# EAGLE board Flanetino Uno Rev 1 (EAGLE 9.6.2)
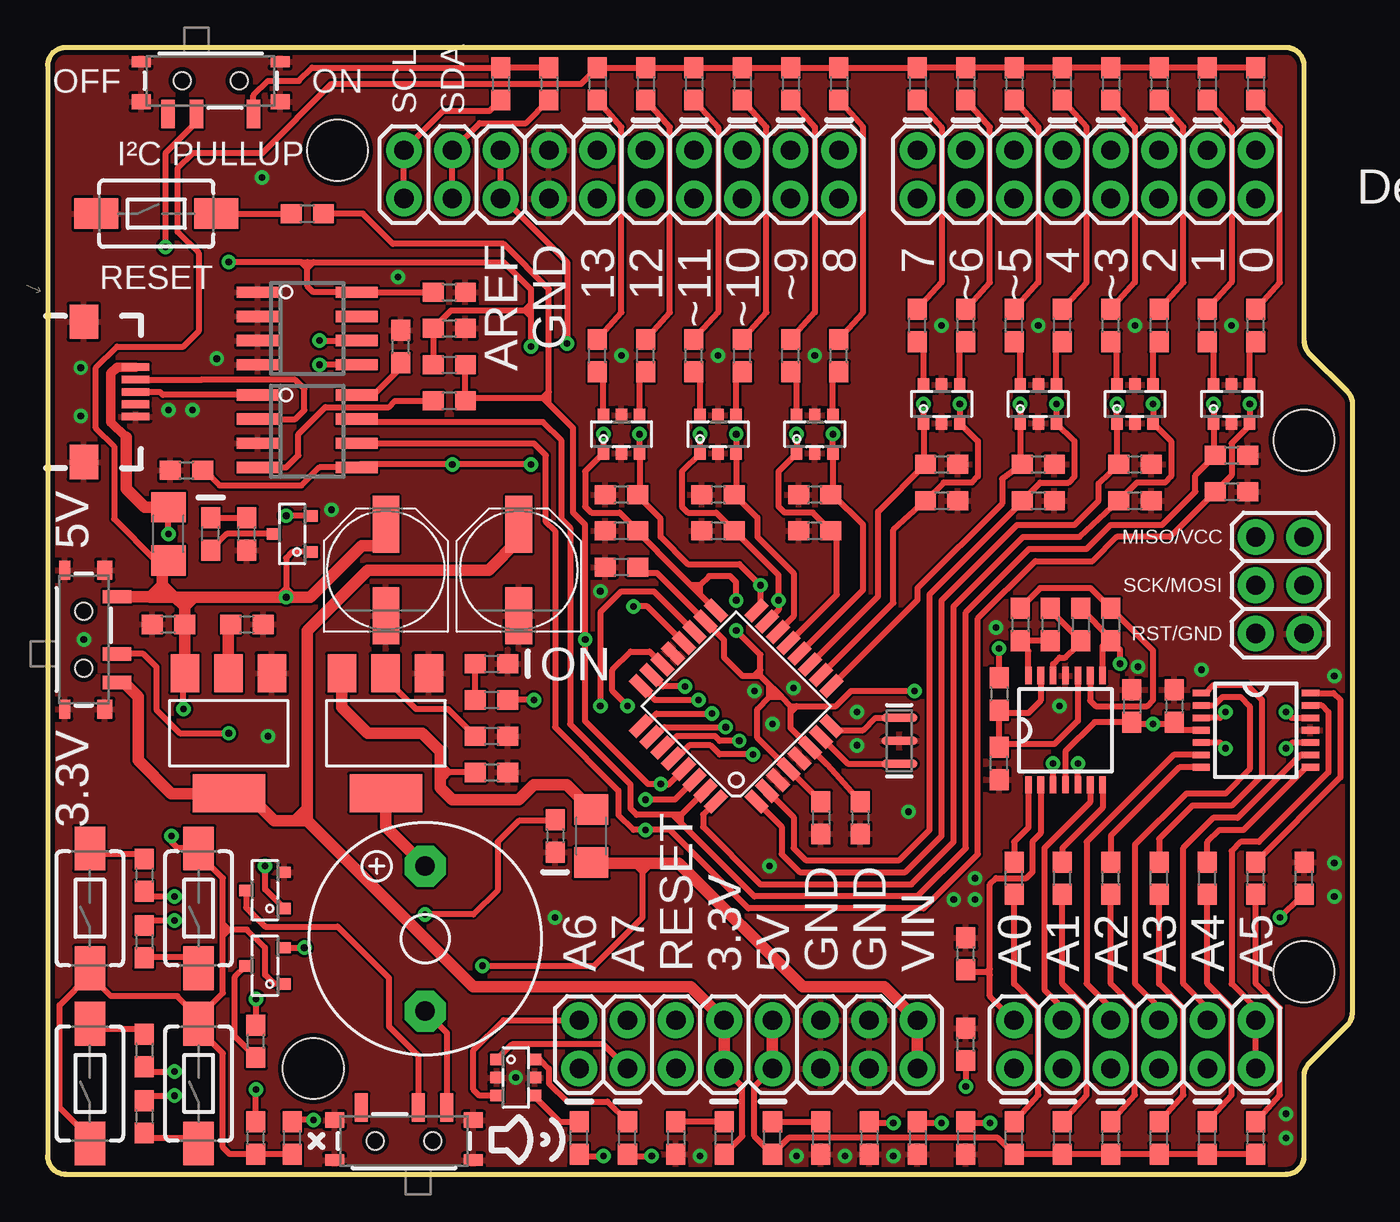
[diagram p0: board, top side]
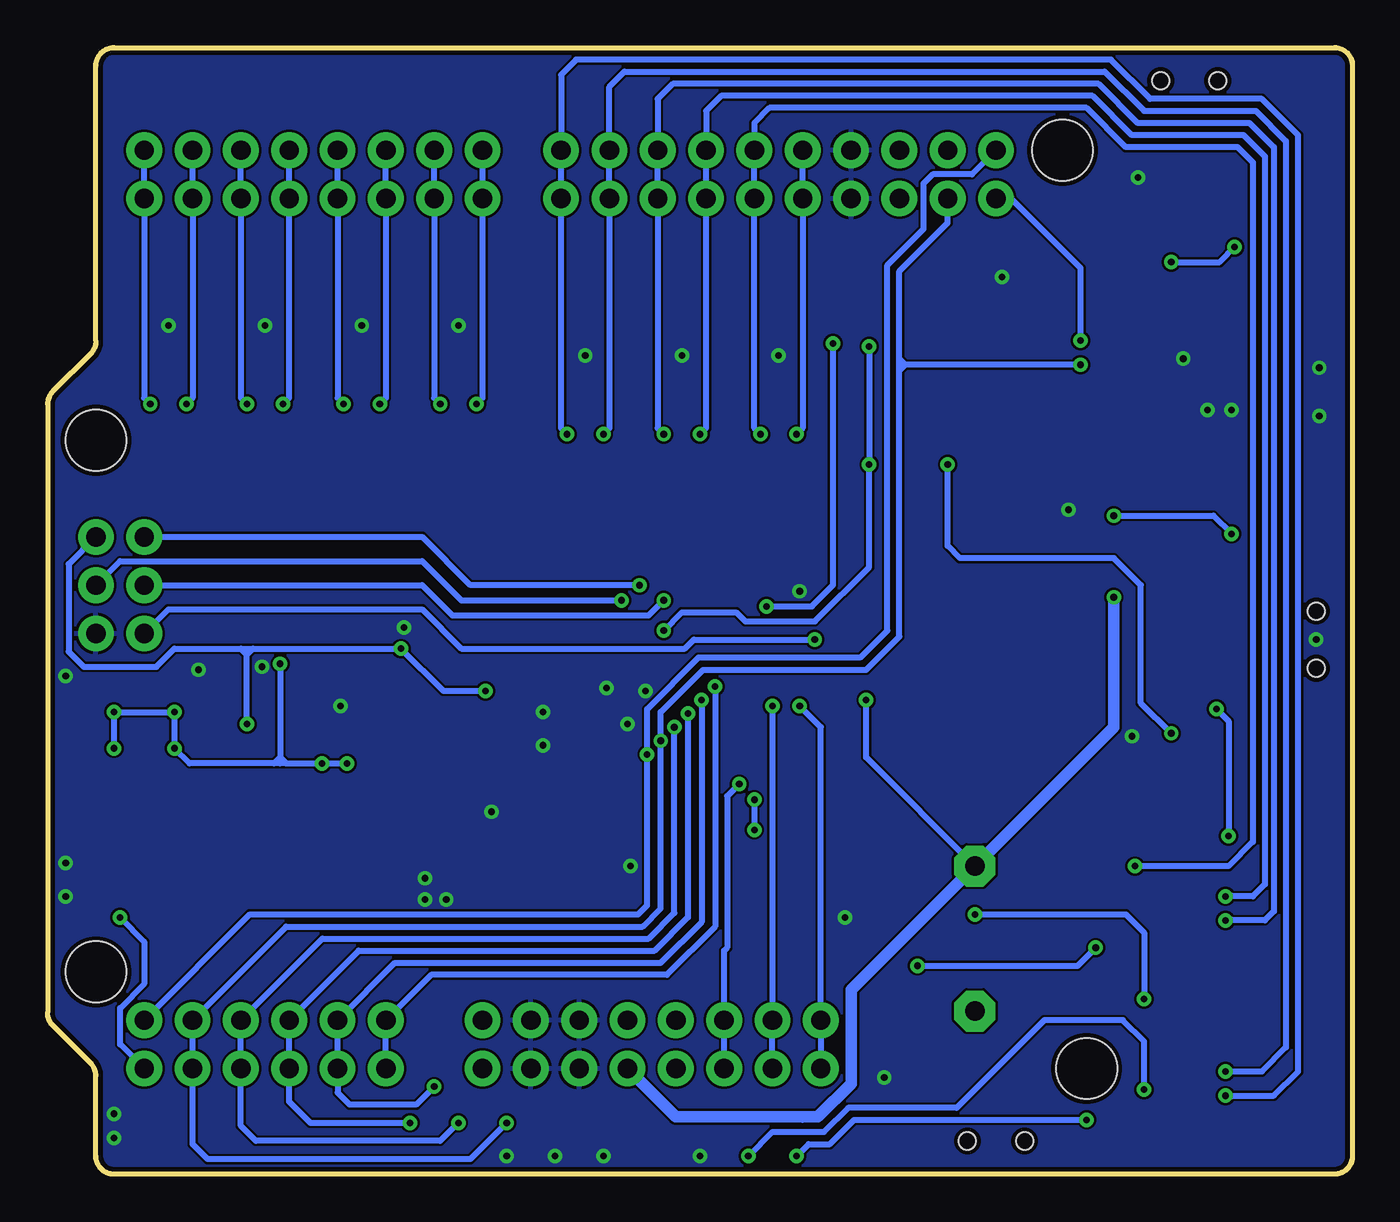
[diagram p1: board, bottom side, seen from below]

Size 68.58 x 59.21 mm. Coordinates in mm from the lower left corner, seen from the top.
Outline: 66.04,43.8 66.04,58.26 arc90 65.09,59.21 0.95,59.21 arc90 0,58.26 0,0.95 arc90 0.95,0 65.09,0 arc90 66.04,0.95 66.04,5.16 arc-45 66.32,5.83 68.3,7.82 arc45 68.58,8.49 68.58,40.47 arc45 68.3,41.14 66.32,43.12 arc-45 66.04,43.8
Copper layers (1*16): Top 0.035mm / dielectric 1.5mm / Bottom 0.035mm
Design rules "default *": minimum track width 6mil, minimum drill 0.2mm, track to track 5mil, track to pad 5mil, pad to pad 5mil, via to via 5mil, smd to smd 5mil, copper to edge 10mil, drill to drill 6mil, minimum pad ring 8mil, minimum via ring 8mil, stop-mask expansion 0mil, vias tented up to drill 24mil, thermal gap 6mil
Net classes: 2 gnd: width 0.305 mm, drill 0.559 mm, clearance 0.254 mm
Holes 3.2 mm at 66.04,38.58 66.04,10.64 15.24,53.82 13.97,5.56

## Footprints (pad centres in the part's own frame; a part is rotated, then mirrored left to right if it is on the bottom)
C0603 = smd 1.1 x 1: 1 -0.85,0; 2 0.85,0
PANASONIC_D = smd 3 x 1.4: + 2.4,0; - -2.4,0
L0603 = smd 1.1 x 1: 1 -0.85,0; 2 0.85,0
1206FUSE = smd 1.6 x 1.8: 1 -1.4,0; 2 1.4,0
2X10 = drill 1.016 pad 1.88: 1 0,0; 2 0,2.54; 3 2.54,0; 4 2.54,2.54; 5 5.08,0; 6 5.08,2.54; 7 7.62,0; 8 7.62,2.54; 9 10.16,0; 10 10.16,2.54; 11 12.7,0; 12 12.7,2.54; 13 15.24,0; 14 15.24,2.54; 15 17.78,0; 16 17.78,2.54; 17 20.32,0; 18 20.32,2.54; 19 22.86,0; 20 22.86,2.54
2X8 = drill 1.016 pad 1.88: 1 0,0; 2 0,2.54; 3 2.54,0; 4 2.54,2.54; 5 5.08,0; 6 5.08,2.54; 7 7.62,0; 8 7.62,2.54; 9 10.16,0; 10 10.16,2.54; 11 12.7,0; 12 12.7,2.54; 13 15.24,0; 14 15.24,2.54; 15 17.78,0; 16 17.78,2.54
USB-B-MICRO-SMD = smd 1.45 x 0.4: D+ 2.725,0; D- 2.725,0.65; GND 2.725,-1.3; ID 2.725,-0.65; VBUS 2.725,1.3 | smd 1.5 x 1.8: SHIELD1 0,3.685; SHIELD2 0,-3.685
2X3 = drill 1.016 pad 1.88: GND 5.08,2.54; MISO 0,0; MOSI 2.54,2.54; RESET 5.08,0; SCK 2.54,0; VCC 0,2.54
2X6 = drill 1.016 pad 1.88: 1 0,0; 2 0,2.54; 3 2.54,0; 4 2.54,2.54; 5 5.08,0; 6 5.08,2.54; 7 7.62,0; 8 7.62,2.54; 9 10.16,0; 10 10.16,2.54; 11 12.7,0; 12 12.7,2.54
F/TMB = drill 1.016 pad 2.159 octagon: + 3.81,0; - -3.81,0
SOT23-6-R = smd 0.6 x 0.7: 1 -0.95,-1; 2 0,-1; 3 0.95,-1; 4 0.95,1; 5 0,1; 6 -0.95,1
SOT23-R = smd 0.6 x 0.7: 1 -0.95,-1; 2 0.95,-1; 3 0,1
R0603 = smd 1.1 x 1: 1 -0.85,0; 2 0.85,0
TACTILE_SWITCH_SMD_6.0X3.5MM = smd 2.3 x 1.6: 1 -3.15,0; 2 3.15,0
SWITCH_SPST_SMD_A = smd 0.7 x 1.5: 1 -2.25,-1.75; 2 -0.75,-1.75; 3 2.25,-1.75 | smd 1 x 0.6: GND1 -3.65,1; GND3 3.65,1 | smd 1 x 0.8: GND2 -3.65,-1.1; GND4 3.65,-1.1 | hole 0.9: -1.5,0; 1.5,0
SO8_RTC = smd 0.6 x 2.2: 1 -1.905,-2.6; 2 -0.635,-2.6; 3 0.635,-2.6; 4 1.905,-2.6; 5 1.905,2.6; 6 0.635,2.6; 7 -0.635,2.6; 8 -1.905,2.6
TQFP32-08 = smd 1.27 x 0.559: 1 -4.293,2.8; 2 -4.293,2; 3 -4.293,1.2; 4 -4.293,0.4; 5 -4.293,-0.4; 6 -4.293,-1.2; 7 -4.293,-2; 8 -4.293,-2.8; 17 4.293,-2.8; 18 4.293,-2; 19 4.293,-1.2; 20 4.293,-0.4; 21 4.293,0.4; 22 4.293,1.2; 23 4.293,2; 24 4.293,2.8 | smd 0.559 x 1.27: 9 -2.8,-4.293; 10 -2,-4.293; 11 -1.2,-4.293; 12 -0.4,-4.293; 13 0.4,-4.293; 14 1.2,-4.293; 15 2,-4.293; 16 2.8,-4.293; 25 2.8,4.293; 26 2,4.293; 27 1.2,4.293; 28 0.4,4.293; 29 -0.4,4.293; 30 -1.2,4.293; 31 -2,4.293; 32 -2.8,4.293
TSSOP14 = smd 0.9 x 0.35: 1 -2.875,1.95; 2 -2.875,1.3; 3 -2.875,0.65; 4 -2.875,0; 5 -2.875,-0.65; 6 -2.875,-1.3; 7 -2.875,-1.95; 8 2.875,-1.95; 9 2.875,-1.3; 10 2.875,-0.65; 11 2.875,0; 12 2.875,0.65; 13 2.875,1.3; 14 2.875,1.95
SOT223 = smd 1.499 x 2.007: 1 -2.261,-3.15; 2 0.025,-3.15; 3 2.311,-3.15 | smd 3.81 x 2.007: 4 0,3.15
RESONATOR-SMD-3.2X1.3 = smd 0.45 x 1.905: 1 -1.2,0; 2 0,0; 3 1.2,0

## Placement (x,y rotation side)
C2  100nF  [C0603]  21.11,46.35 0 top
C3  100nF  [C0603]  21.11,44.45 0 top
C4  100nF  [C0603]  18.57,43.5 90 top
C5  100nF  [C0603]  21.11,40.64 180 top
C6  100nF  [C0603]  7.3,36.99 0 top
C7  100nF  [C0603]  30.16,31.91 180 top
C8  100nF  [C0603]  23.34,23.02 180 top
C9  100nF  [C0603]  6.35,28.89 0 top
C10  100nF  [C0603]  10.48,28.89 180 top
C11  100nF  [C0603]  55.88,28.89 270 top
C12  100nF  [C0603]  56.99,24.61 270 top
C13  100nF  [C0603]  59.21,24.61 270 top
C14  47uF  [PANASONIC_D]  17.78,31.75 90 top
C15  47uF  [PANASONIC_D]  24.77,31.75 90 top
C17  100nF  [C0603]  40.64,18.73 270 top
C18  100nF  [C0603]  42.7,18.73 270 top
C19  100nF  [C0603]  23.34,21.11 180 top
D1  GREEN  [L0603]  28.89,57.31 270 top
D2  GREEN  [L0603]  31.43,57.31 270 top
D3  GREEN  [L0603]  33.97,57.31 270 top
D4  GREEN  [L0603]  36.51,57.31 270 top
D5  GREEN  [L0603]  39.05,57.31 270 top
D6  GREEN  [L0603]  41.59,57.31 270 top
D7  GREEN  [L0603]  45.72,57.31 270 top
D8  GREEN  [L0603]  48.26,57.31 270 top
D9  GREEN  [L0603]  50.8,57.31 270 top
D10  GREEN  [L0603]  53.34,57.31 270 top
D11  GREEN  [L0603]  55.88,57.31 270 top
D12  GREEN  [L0603]  58.42,57.31 270 top
D13  GREEN  [L0603]  60.96,57.31 270 top
D14  GREEN  [L0603]  63.5,57.31 270 top
D15  GREEN  [L0603]  23.34,26.83 0 top
D16  RED  [L0603]  8.57,33.66 90 top
D17  GREEN  [L0603]  35.56,1.91 90 top
D18  GREEN  [L0603]  38.1,1.91 90 top
D19  GREEN  [L0603]  50.8,1.91 90 top
D20  GREEN  [L0603]  53.34,1.91 90 top
D21  GREEN  [L0603]  55.88,1.91 90 top
D22  GREEN  [L0603]  58.42,1.91 90 top
D23  GREEN  [L0603]  60.96,1.91 90 top
D24  GREEN  [L0603]  63.5,1.91 90 top
D25  GREEN  [L0603]  30.48,1.91 90 top
D26  GREEN  [L0603]  27.94,1.91 90 top
D27  RED  [L0603]  26.67,17.78 270 top
F1  1A  [1206FUSE]  6.35,33.66 90 top
F2  1A  [1206FUSE]  28.57,17.78 90 top
J1  2x10 female pin header  [2X10]  18.73,51.28 0 top
J2  2x3 female pin header  [2X8]  45.72,51.28 0 top
J3  micro usb connector  [USB-B-MICRO-SMD]  1.91,41.12 0 top
J4  2x3male iscp header  [2X3]  63.5,33.5 270 top
J5  2x8 female pin reader  [2X8]  27.94,5.56 0 top
J6  2x6 female pin header  [2X6]  50.8,5.56 0 top
LS1  buzzer  [F/TMB]  19.84,12.38 90 top
Q1  [SOT23-6-R]  35.24,38.89 0 top
Q2  [SOT23-6-R]  40.32,38.89 0 top
Q3  [SOT23-6-R]  46.99,40.48 0 top
Q4  [SOT23-6-R]  52.07,40.48 0 top
Q5  [SOT23-6-R]  30.16,38.89 0 top
Q6  [SOT23-6-R]  57.15,40.48 0 top
Q7  [SOT23-6-R]  62.23,40.48 0 top
Q8  mosfet p  [SOT23-R]  12.86,33.66 90 top
Q9  mosfet n  [SOT23-R]  11.43,14.92 90 top
Q10  [SOT23-6-R]  24.61,5.08 270 top
Q11  mosfet p  [SOT23-R]  11.43,10.95 90 top
R1  4K7  [R0603]  23.81,57.31 270 top
R2  4K7  [R0603]  26.35,57.31 270 top
R3  330R  [R0603]  13.65,50.48 0 top
R4  330R  [R0603]  45.72,44.61 90 top
R5  330R  [R0603]  48.26,44.61 90 top
R6  330R  [R0603]  50.8,44.61 90 top
R7  330R  [R0603]  53.34,44.61 90 top
R8  330R  [R0603]  55.88,44.61 90 top
R9  330R  [R0603]  58.42,44.61 90 top
R10  330R  [R0603]  60.96,44.61 90 top
R11  330R  [R0603]  63.5,44.61 90 top
R12  330R  [R0603]  28.89,43.02 90 top
R13  330R  [R0603]  31.43,43.02 90 top
R14  330R  [R0603]  33.97,43.02 90 top
R15  330R  [R0603]  36.51,43.02 90 top
R16  330R  [R0603]  39.05,43.02 90 top
R17  330R  [R0603]  41.59,43.02 90 top
R18  4K7  [R0603]  21.11,42.55 0 top
R19  1M  [R0603]  46.99,37.31 0 top
R20  1M  [R0603]  52.07,37.31 0 top
R21  1M  [R0603]  57.15,37.31 0 top
R22  1M  [R0603]  62.23,37.78 0 top
R23  1M  [R0603]  62.23,35.88 0 top
R24  1M  [R0603]  30.16,35.72 180 top
R25  1M  [R0603]  35.24,35.72 180 top
R26  1M  [R0603]  40.32,35.72 180 top
R27  1M  [R0603]  46.99,35.4 0 top
R28  1M  [R0603]  52.07,35.4 0 top
R29  1M  [R0603]  57.15,35.4 0 top
R30  330R  [R0603]  23.34,24.92 0 top
R31  1M  [R0603]  30.16,33.81 180 top
R32  1M  [R0603]  35.24,33.81 180 top
R33  1M  [R0603]  40.32,33.81 180 top
R34  330R  [R0603]  10.48,33.66 90 top
R35  4K7  [R0603]  51.12,28.89 270 top
R36  1K  [R0603]  52.7,28.89 270 top
R37  910R  [R0603]  54.29,28.89 270 top
R38  47K  [R0603]  50.01,25.24 270 top
R39  47K  [R0603]  50.01,21.59 90 top
R40  330R  [R0603]  10.95,6.99 90 top
R41  330R  [R0603]  12.86,1.91 90 top
R42  330R  [R0603]  5.08,6.51 270 top
R43  330R  [R0603]  50.8,15.56 90 top
R44  330R  [R0603]  53.34,15.56 90 top
R45  330R  [R0603]  55.88,15.56 90 top
R46  330R  [R0603]  58.42,15.56 90 top
R47  330R  [R0603]  60.96,15.56 90 top
R48  330R  [R0603]  63.5,15.56 90 top
R49  47K  [R0603]  66.04,15.56 90 top
R50  330R  [R0603]  5.08,12.22 270 top
R51  47K  [R0603]  48.26,11.59 90 top
R52  47K  [R0603]  48.26,6.83 90 top
R53  330R  [R0603]  5.08,15.72 270 top
R54  330R  [R0603]  5.08,3.02 270 top
R55  330R  [R0603]  33.02,1.91 270 top
R56  330R  [R0603]  40.64,1.91 270 top
R57  47K  [R0603]  43.18,1.91 270 top
R58  47K  [R0603]  45.72,1.91 270 top
R59  47K  [R0603]  48.26,1.91 270 top
R60  330R  [R0603]  10.95,1.91 90 top
S1  pushbutton  [TACTILE_SWITCH_SMD_6.0X3.5MM]  5.71,50.48 0 top
S2  pushbutton  [TACTILE_SWITCH_SMD_6.0X3.5MM]  2.22,13.97 90 top
S3  pushbutton  [TACTILE_SWITCH_SMD_6.0X3.5MM]  7.94,13.97 90 top
S4  pushbutton  [TACTILE_SWITCH_SMD_6.0X3.5MM]  2.22,4.76 90 top
S5  pushbutton  [TACTILE_SWITCH_SMD_6.0X3.5MM]  7.94,4.76 90 top
SS1  SLIDE SWITCH  [SWITCH_SPST_SMD_A]  8.57,57.47 0 top
SS2  SLIDE SWITCH  [SWITCH_SPST_SMD_A]  1.91,28.1 90 top
SS3  SLIDE SWITCH  [SWITCH_SPST_SMD_A]  18.73,1.75 180 top
U1  EEPROM  [SO8_RTC]  13.65,44.45 270 top
U2  CH340N  [SO8_RTC]  13.65,39.05 270 top
U3  ATMEGA328P  [TQFP32-08]  36.2,24.61 135 top
U4  LMV324  [TSSOP14]  53.5,23.34 90 top
U5  LMV324  [TSSOP14]  63.5,23.34 0 top
U6  AMS1117-3.3  [SOT223]  9.53,23.18 180 top
U7  AMS1117-5.0  [SOT223]  17.78,23.18 180 top
Y2  CSTNE12M0G52Z000R0  [RESONATOR-SMD-3.2X1.3]  44.77,22.78 90 top

## Library data of the parts
C2-C13 C17-C19 = Aquariobô; MPN: CC0603KRX7R9BB104
C14 C15 = Aquariobô; MPN: VEJ470M1HTR-0607
D1-D15 D17-D26 = Aquariobô; MPN: 19-217/GHC-YR1S2/3T
D16 D27 = Aquariobô; MPN: KT-0603R
F1 F2 = Aquariobô; MPN: 12D1100C
J1-J6 Q3 Q4 Q6 Q7 = Aquariobô
LS1 = Aquariobô; MPN: TMB12A03
Q1 Q2 Q5 Q10 = Aquariobô; MPN: NDC7002N
Q8 Q11 = Aquariobô; MPN: AO3401A
Q9 = Aquariobô; MPN: NCE3401
R1 R2 R18 R35 = Aquariobô; MPN: 0603WAF4701T5E
R3-R17 R30 R34 R40-R48 R50 R53-R56 R60 = Aquariobô; MPN: 0603WAF3300T5E
R19-R29 R31-R33 = Aquariobô; MPN: 0603WAF1004T5E
R36 = Aquariobô; MPN: 0603WAF1001T5E
R37 = Aquariobô; MPN: 0603WAF9100T5E
R38 R39 R49 R51 R52 R57-R59 = Aquariobô; MPN: 0603WAF4702T5E
S1-S5 = Aquariobô; MPN: K2-1101ST-A4SA-01
SS1-SS3 = Aquariobô; MPN: K3-1296S-E2
U1 = Aquariobô; MPN: M24512-WMN6TP
U2 = Aquariobô; MPN: CH340N
U3 = Aquariobô; MPN: ATMEGA328P-AU
U4 U5 = Aquariobô; MPN: LMV324IPWR
U6 U7 = Aquariobô; MPN: AMS1117-3.3
Y2 = Aquariobô; MPN: CSTNE12M0G52Z000R0

## Nets
3V3: C15.+ D17.1 J5.7 J5.8 SS2.1 U6.4
3V3_C: C10.2 U6.2
5V: C9.2 C14.+ D1.1 D2.1 D3.1 D4.1 D5.1 D6.1 D7.1 D8.1 D9.1 D10.1 D11.1 D12.1 D13.1 D14.1 D18.1 D19.1 D20.1 D21.1 D22.1 D23.1 D24.1 F1.1 J5.9 J5.10 LS1.+ Q8.1 Q11.1 R30.2 R41.1 R60.1 S2.1 S3.2 S4.1 S5.2 SS2.3 U6.3 U7.4
5V_C: C8.2 U7.2
A0: J6.1 J6.2 R51.1 U3.23 U4.2
A1: J6.3 J6.4 R52.1 U3.24 U4.6
A2: J6.5 J6.6 R59.1 U3.25 U5.6
A3: J6.7 J6.8 R58.1 U3.26 U5.2
A4/SDA: J1.3 J1.4 J6.9 J6.10 R2.2 R57.1 U1.5 U3.27 U5.9
A5/SCL: J1.1 J1.2 J6.11 J6.12 R1.2 R49.1 U1.6 U3.28 U5.13
A6: J5.1 J5.2 Q10.3 U3.19
A7: J5.3 J5.4 Q10.1 U3.22
AREF: J1.5 J1.6 U3.20
D0: J2.15 J2.16 Q7.3 R23.1 U2.6 U3.30
D1: J2.13 J2.14 Q7.1 R22.1 U2.7 U3.31
D2: J2.11 J2.12 Q6.3 R29.1 U3.32
D3: J2.9 J2.10 Q6.1 R21.1 U3.1
D4: J2.7 J2.8 Q4.3 R28.1 U3.2
D5: J2.5 J2.6 Q4.1 R20.1 U3.9
D6: J2.3 J2.4 Q3.3 R27.1 U3.10
D7: J2.1 J2.2 Q3.1 R19.1 U3.11
D8: J1.19 J1.20 Q2.3 R26.1 R54.1 U3.12
D9: J1.17 J1.18 Q2.1 R33.1 R42.2 U3.13
D10: J1.15 J1.16 Q1.3 R25.1 R50.1 U3.14
D11: J1.13 J1.14 J4.MOSI Q1.1 R32.1 R53.2 U3.15
D12: J1.11 J1.12 J4.MISO Q5.3 Q9.1 R24.1 U3.16
D13: J1.9 J1.10 J4.SCK Q5.1 R31.1 U3.17
D+: J3.D+ U2.1
D-: J3.D- U2.2
GND: C2.2 C3.2 C4.2 C6.1 C7.2 C8.1 C9.1 C10.1 C12.1 C13.1 C14.- C15.- C17.2 C18.2 C19.1 D15.2 D27.2 J1.7 J1.8 J3.GND J3.SHIELD1 J3.SHIELD2 J4.GND J5.11 J5.12 J5.13 J5.14 Q1.2 Q1.5 Q2.2 Q2.5 Q3.2 Q3.5 Q4.2 Q4.5 Q5.2 Q5.5 Q6.2 Q6.5 Q7.2 Q7.5 Q9.2 Q10.2 Q10.5 R19.2 R20.2 R21.2 R22.2 R23.2 R24.2 R25.2 R26.2 R27.2 R28.2 R29.2 R31.2 R32.2 R33.2 R34.1 R39.1 R49.2 R51.2 R52.2 R55.2 R56.2 R57.2 R58.2 R59.2 S1.1 SS1.GND1 SS1.GND2 SS1.GND3 SS1.GND4 SS2.GND1 SS2.GND2 SS2.GND3 SS2.GND4 SS3.GND1 SS3.GND2 SS3.GND3 SS3.GND4 U1.1 U1.2 U1.3 U1.4 U2.3 U3.3 U3.5 U3.21 U4.11 U5.11 U6.1 U7.1 Y2.2
I2CPULLUP: R1.1 R2.1 SS1.3
LA0: D19.2 R43.1
LA0_: R43.2 U4.1
LA1: D20.2 R44.1
LA1_: R44.2 U4.7
LA2: D21.2 R45.1
LA2_: R45.2 U5.7
LA3: D22.2 R46.1
LA3_: R46.2 U5.1
LA4: D23.2 R47.1
LA4_: R47.2 U5.8
LA5: D24.2 R48.1
LA6: D26.2 Q10.4
LA7: D25.2 Q10.6
LD0: D14.2 R11.2
LD0_: Q7.4 R11.1
LD1: D13.2 R10.2
LD1_: Q7.6 R10.1
LD2: D12.2 R9.2
LD2_: Q6.4 R9.1
LD3: D11.2 R8.2
LD3_: Q6.6 R8.1
LD4: D10.2 R7.2
LD4_: Q4.4 R7.1
LD5: D9.2 R6.2
LD5_: Q4.6 R6.1
LD6: D8.2 R5.2
LD6_: Q3.4 R5.1
LD7: D7.2 R4.2
LD7_: Q3.6 R4.1
LD8: D6.2 R17.2
LD8_: Q2.4 R17.1
LD9: D5.2 R16.2
LD9_: Q2.6 R16.1
LD10: D4.2 R15.2
LD10_: Q1.4 R15.1
LD11: D3.2 R14.2
LD11_: Q1.6 R14.1
LD12: D2.2 R13.2
LD12_: Q5.4 R13.1
LD13: D1.2 R12.2
LD13_: Q5.6 R12.1
RESET: C5.1 J4.RESET J5.5 J5.6 R3.2 R18.2 U3.29
RTS#: C5.2 U2.4
S$1: R3.1 S1.2
S$4: LS1.- SS3.1
S$5: Q9.3 SS3.2
S$6: D17.2 R55.1
S$9: Q11.3 R40.1
S$10: D18.2 R56.1
S$12: D27.1 R40.2
S$13: D26.1 R41.2
S$15: D25.1 R60.2
S$17: R48.2 U5.14
S$19: R50.2 S3.1
S$21: R53.1 S2.2
S$22: R54.2 S5.1
S$23: R42.1 S4.2
S$26: D15.1 R30.1
S$27: D16.1 Q8.3
S$29: D16.2 R34.2
TRIANG: C11.2 R37.1 U4.3 U4.5 U4.8 U5.3 U5.5 U5.10 U5.12
V1+: R36.1 R37.2 U4.12
V1S: R35.2 R36.2 U4.14
V2-: C11.1 R35.1 U4.9
V3: C4.1 U2.8
VBUS: F1.2 J3.VBUS Q8.2
VCC: C2.1 C3.1 C6.2 C7.1 C12.2 C13.2 C17.1 C18.1 J4.VCC R18.1 R38.1 SS1.2 SS2.2 U1.8 U2.5 U3.4 U3.6 U3.18 U4.4 U5.4
VCC/2: R38.2 R39.2 U4.10 U4.13
VIN: C19.2 F2.2 U7.3
VIN_RAW: F2.1 J5.15 J5.16 Q11.2
XTAL1: U3.7 Y2.1
XTAL2: U3.8 Y2.3

## Tracks (layer width: path | path; a pad name or v marks a point on that pad's centre or on a via)
3V3
  Top 0.305: D17.1 36.51,2.01 36.51,4.6 J5.7
  Top 0.61: J5.7 J5.8 33.81,9.84 22.38,9.84 13.65,18.57 | SS2.1 4,25.85 4.76,25.08 4.76,21.75 6.51,20 9.5,20 U6.4 9.55,20 10.48,20 11.91,18.57 13.02,18.57 | 13.65,18.57 13.02,18.57 | C15.+ 24.77,33.34 23.18,31.75 16.83,31.75 13.65,28.57 13.65,19.21 | 13.65,19.21 13.65,18.57 | 13.65,19.21 13.02,18.57
3V3_C
  Top 0.61: C10.2 9.5,28.87 U6.2
5V  (via drill 0.35)
  Top 0.305: D14.1 D13.1 D12.1 D11.1 D10.1 D9.1 D8.1 D7.1 D6.1 D5.1 D4.1 D3.1 D2.1 D1.1 28.04,57.31 14.92,57.31 11.27,53.66 7.62,53.66 6.83,52.86 6.83,49.53 7.94,48.42 7.94,44.29 7.14,43.5 3.65,43.5 2.54,42.39 2.54,39.21 3.49,38.26 3.49,34.45 5.69,32.26 6.03,32.26 F1.1 | D24.1 D23.1 D22.1 D21.1 D20.1 D19.1 49.95,1.91 38.95,1.91 D18.1 37.15,2.01 37.15,4.6 J5.9 | S4.1 2.22,1.91 0.64,3.49 0.64,8.89 2.22,10.48 | 2.22,10.48 S2.1 | 7.94,8.26 6.83,9.37 3.33,9.37 2.22,10.48 | v7.14,24.45 7.14,26.26 U6.3 | v6.51,17.78 6.51,17.46 6.85,17.12 S3.2 7.94,16.83 9.21,15.56 9.21,13.18 | 13.97,32.59 Q8.1 12.86,32.7 12.54,32.38 12.54,30.8 | v25.56,24.92 R30.2 | 12.54,30.8 v12.54,30.32 | 12.54,30.8 13.02,30.32 | 12.54,30.8 12.06,30.32 | 7.94,8.26 S5.2 7.94,7.62 9.21,6.35 9.21,1.43 9.58,1.05 R60.1 R41.1 | 9.21,12.54 9.21,9.53 7.94,8.26 | 9.21,12.54 9.21,12.86 | 9.21,12.86 9.21,13.18 | Q11.1 11.9,10 11.43,10.48 11.43,11.91 10.48,12.86 9.53,12.86 | 9.21,12.86 9.53,12.86 | 9.53,12.86 9.21,13.18 | 9.53,12.86 9.21,12.54
  Top 0.61: J5.10 J5.9 | U6.3 7.21,28.66 C9.2 7.2,29.84 | SS2.3 5.37,30.35 5.4,30.32 | U7.4 17.78,18.26 LS1.+ | C14.+ 17.78,33.5 17.3,33.02 16.51,33.02 13.81,30.32 13.02,30.32 v12.54,30.32 12.06,30.32 7.68,30.32 | 5.4,30.32 6.03,30.32 | 6.03,30.32 6.67,30.32 | 6.72,30.32 7.3,30.32 | 7.3,30.32 7.68,30.32 | 7.2,29.84 7.2,30.22 7.3,30.32 | 7.2,29.84 6.72,30.32 | 7.2,29.84 7.68,30.32 | 6.03,30.32 6.03,30.96 | 6.03,30.96 5.4,30.32 | 6.03,30.96 6.67,30.32 | 6.67,30.32 6.72,30.32 | 6.03,30.96 6.03,32.26
  Bottom 0.305: v7.14,24.45 6.51,23.81 v6.51,17.78 | 28.89,2.86 28.89,3.02 | LS1.+ 25.56,21.91 v25.56,24.92
  Bottom 0.61: J5.9 35.56,3.02 28.89,3.02 28.1,3.02 26.35,4.76 26.35,9.68 LS1.+ 12.54,23.5 v12.54,30.32
5V_C
  Top 0.305: C8.2 21.06,24.45 19.37,24.45 17.75,26.06 U7.2
A0  (via drill 0.35)
  Top 0.305: U3.23 32.34,25.64 v33.5,25.64 | J6.2 49.53,9.37 49.53,10.48 | 49.53,10.48 49.53,10.79 | R51.1 48.31,10.64 49.37,10.64 | 49.37,10.64 49.53,10.79 | 49.37,10.64 49.53,10.48 | 49.53,10.79 49.53,15.24 49.85,15.56 51.44,15.56 51.75,15.88 51.75,17.46 52.2,17.91 U4.2
  Bottom 0.305: v33.5,25.64 33.5,13.02 36.04,10.48 48.42,10.48 J6.2 J6.1
A1  (via drill 0.35)
  Top 0.305: U3.24 31.92,24.92 v34.21,24.92 | J6.4 53.34,8.74 52.39,9.7 52.39,17.14 54.8,19.56 U4.6 | R52.1 v48.26,4.6
  Bottom 0.305: v34.21,24.92 34.21,13.26 36.35,11.11 50.32,11.11 J6.4 J6.3 53.34,4.29 52.7,3.65 49.21,3.65 v48.26,4.6
A2  (via drill 0.35)
  Top 0.305: U3.25 31.34,23.55 32,24.21 v34.92,24.21 | J6.6 55.88,8.74 54.61,10.01 54.61,17.46 59.18,22.04 U5.6 | R59.1 48.32,2.7 v49.53,2.7
  Bottom 0.305: v34.92,24.21 34.92,13.49 36.67,11.75 52.23,11.75 J6.6 J6.5 55.88,3.81 54.77,2.7 v49.53,2.7
A3  (via drill 0.35)
  Top 0.305: U3.26 31.9,22.98 32.41,23.5 v35.64,23.5 | J6.8 58.42,8.74 57.15,10.01 57.15,17.3 59.85,20 61.91,20 63.18,21.27 63.18,24.61 62.71,25.08 61.75,25.08 61.31,24.64 U5.2 | R58.1 45.78,2.7 v46.99,2.7
  Bottom 0.305: v35.64,23.5 35.64,13.73 36.99,12.38 54.13,12.38 J6.8 J6.7 58.42,2.54 57.63,1.75 47.94,1.75 v46.99,2.7
A4/SDA  (via drill 0.35)
  Top 0.305: J1.3 J1.4 22.7,55.24 25.14,55.24 R2.2 | U3.27 32.47,22.42 33.07,23.02 35.08,23.02 35.32,22.78 v36.35,22.78 | J6.10 60.96,8.73 59.69,10 59.69,17.16 61.26,18.73 62.55,18.73 65.85,22.04 U5.9 | R57.1 43.24,2.7 v44.45,2.7 | U1.5 v14.29,42.55
  Bottom 0.305: J1.3 21.27,50.01 23.81,47.47 23.81,42.86 | v44.45,2.7 46.35,0.79 60.17,0.79 60.96,1.59 J6.9 J6.10 56.04,13.02 37.31,13.02 36.35,13.97 v36.35,22.78 36.35,24.29 34.13,26.51 25.56,26.51 23.81,28.26 23.81,42.23 | 23.81,42.23 23.81,42.86 | v14.29,42.55 23.5,42.55 | 23.81,42.86 23.5,42.55 | 23.5,42.55 23.81,42.23
A5/SCL  (via drill 0.35)
  Top 0.305: J6.11 J6.12 63.5,8.73 62.23,10 62.23,16.99 62.71,17.46 63.66,17.46 67.31,21.11 67.31,24.29 66.96,24.64 U5.13 | J1.1 J1.2 20.8,55.88 23.23,55.88 R1.2 | v37.07,22.07 35.32,22.07 34.85,22.54 33.72,22.54 33.04,21.85 U3.28 | R49.1 65.83,14.56 v64.77,13.49 | v14.29,43.81 U1.6
  Bottom 0.305: J6.12 57.94,13.65 37.54,13.65 37.07,14.13 v37.07,22.07 37.07,24.45 34.37,27.15 25.88,27.15 24.45,28.57 24.45,47.78 22.54,49.69 22.54,52.07 22.07,52.55 20,52.55 J1.2 | v64.77,13.49 63.5,12.22 63.5,10 64.77,8.73 64.77,6.83 J6.11 | v14.29,43.81 14.29,47.62 17.94,51.28 J1.1
A6  (via drill 0.35)
  Top 0.305: U3.19 31.86,30.64 30.16,30.64 29.05,29.53 v29.05,24.61 | J5.2 23.97,8.1 22.38,6.51 22.38,4.45 22.7,4.13 Q10.3
  Bottom 0.305: J5.1 J5.2 27.94,23.5 v29.05,24.61
A7  (via drill 0.35)
  Top 0.305: U3.22 31.64,27.46 30.64,27.46 29.69,26.51 29.69,25.4 v30.48,24.61 | J5.3 29.21,6.83 24.43,6.83 24.4,6.8 24.38,6.8 Q10.1
  Bottom 0.305: J5.3 J5.4 v30.48,24.61
AREF  (via drill 0.35)
  Top 0.305: J1.6 J1.5 23.97,51.28 27.3,47.94 v27.3,43.66 | U3.20 31.52,29.84 v30.8,29.84
  Bottom 0.305: v30.8,29.84 28.42,29.84 27.3,30.96 v27.3,43.66
D0  (via drill 0.35)
  Top 0.305: U3.30 32.97,19.68 v31.43,19.68 | v63.18,40.48 Q7.3 63.18,39.37 62.23,38.42 62.23,36.73 R23.1 59,33.5 56.2,33.5 54.93,32.23 51.91,32.23 48.9,29.21 48.9,16.83 46.04,13.97 36.83,13.97 32.7,18.1 v31.43,18.1 30.8,18.1 30,18.89 30,20.16 26.67,23.5 26.67,33.81 26.19,34.29 26.19,37.78 25.56,38.42 U2.6
  Bottom 0.305: v31.43,19.68 v31.43,18.1 | J2.16 J2.15 63.5,40.8 v63.18,40.48
D1  (via drill 0.35)
  Top 0.305: 33.31,18.44 37.15,14.61 45.72,14.61 48.26,17.14 48.26,29.53 51.59,32.86 54.61,32.86 55.88,34.13 58.58,34.13 60.33,35.88 60.33,36.73 R22.1 61.28,37.88 Q7.1 v61.28,40.48 | U3.31 33.31,18.89 | 33.31,18.89 32.86,18.89 | 33.31,18.44 33.31,18.89 | 33.31,18.44 32.86,18.89 | U2.7 16.41,39.53 26.04,39.53 26.99,38.58 26.99,34.45 27.46,33.97 27.46,23.65 30.64,20.48 30.64,19.21 30.96,18.89 32.86,18.89
  Bottom 0.305: J2.14 J2.13 60.96,40.8 v61.28,40.48
D2  (via drill 0.35)
  Top 0.305: U3.32 34.45,18.9 34.45,18.26 37.47,15.24 45.4,15.24 47.62,17.46 47.62,29.84 51.28,33.5 54.24,33.5 R29.1 57.25,36.35 58.74,36.35 59.05,36.67 59.05,38.53 Q6.3 v58.1,40.48
  Bottom 0.305: J2.12 J2.11 58.42,40.8 v58.1,40.48
D3  (via drill 0.35)
  Top 0.305: U3.1 38.58,18.27 38.58,16.83 39.53,15.88 45.09,15.88 46.99,17.78 46.99,30.16 50.96,34.13 53.98,34.13 55.24,35.4 55.24,36.31 R21.1 56.23,37.38 56.2,37.41 Q6.1 v56.2,40.48
  Bottom 0.305: J2.10 J2.9 55.88,40.8 v56.2,40.48
D4  (via drill 0.35)
  Top 0.305: U3.2 39.21,18.76 39.21,17.14 39.85,16.51 44.77,16.51 46.35,18.1 46.35,30.48 51.07,35.2 R28.1 52.17,36.35 53.66,36.35 53.98,36.67 53.98,38.53 Q4.3 v53.02,40.48
  Bottom 0.305: J2.8 J2.7 53.34,40.8 v53.02,40.48
D5  (via drill 0.35)
  Top 0.305: U3.9 45.72,30.17 45.72,30.8 50.16,35.24 50.16,36.54 R20.1 51.15,37.38 51.12,37.41 Q4.1 v51.12,40.48
  Bottom 0.305: J2.6 J2.5 50.8,40.8 v51.12,40.48
D6  (via drill 0.35)
  Top 0.305: U3.10 44.45,30.03 44.45,33.86 R27.1 47.09,36.35 48.58,36.35 48.9,36.67 48.9,38.53 Q3.3 v47.94,40.48
  Bottom 0.305: J2.4 J2.3 48.26,40.8 v47.94,40.48
D7  (via drill 0.35)
  Top 0.305: U3.11 43.66,30.37 43.66,34.82 R19.1 46.07,37.38 46.04,37.41 Q3.1 v46.04,40.48
  Bottom 0.305: J2.2 J2.1 45.72,40.8 v46.04,40.48
D8  (via drill 0.35)
  Top 0.305: U3.12 42.86,30.71 42.86,34.13 41.27,35.72 | R54.1 5.34,4.13 v6.67,4.13 | 41.27,35.72 R26.1 | 41.27,35.72 Q2.3 v41.27,38.89
  Bottom 0.305: v6.67,4.13 4.13,4.13 2.86,5.4 2.86,54.61 4.76,56.52 10.64,56.52 12.7,58.58 40.8,58.58 41.59,57.78 J1.20 J1.19 41.59,39.21 v41.27,38.89
D9  (via drill 0.35)
  Top 0.305: U3.13 41.49,30.47 41.49,33.5 R33.1 40.22,34.77 38.73,34.77 38.42,35.08 38.42,36.94 Q2.1 v39.37,38.89 | R42.2 5.34,5.4 v6.67,5.4
  Bottom 0.305: v6.67,5.4 4.76,5.4 3.49,6.67 3.49,54.29 5.08,55.88 10.95,55.88 13.02,57.94 38.26,57.94 39.05,57.15 J1.18 J1.17 39.05,39.21 v39.37,38.89
D10  (via drill 0.35)
  Top 0.305: U3.14 39.21,29.32 39.21,31.59 37.31,33.5 37.31,34.51 36.14,35.67 | R50.1 5.34,13.34 v6.67,13.34 | R25.1 36.14,35.67 | 36.14,35.67 36.19,35.72 Q1.3 v36.2,38.89
  Bottom 0.305: v6.67,13.34 4.6,13.34 4.13,13.81 4.13,53.98 5.4,55.24 11.27,55.24 13.34,57.31 35.72,57.31 36.51,56.52 J1.16 J1.15 36.51,39.21 v36.2,38.89
D11  (via drill 0.35)
  Top 0.305: U3.15 38.42,29.66 v38.42,30.16 38.42,31.49 R32.1 35.14,34.77 33.66,34.77 33.34,35.08 33.34,36.94 Q1.1 v34.29,38.89 | R53.2 5.34,14.61 v6.67,14.61
  Bottom 0.305: J4.MOSI 64.77,32.23 48.9,32.23 46.83,30.16 v38.42,30.16 | v6.67,14.61 5.24,14.61 4.6,15.24 4.6,53.5 5.71,54.61 11.59,54.61 13.65,56.67 33.18,56.67 33.97,55.88 J1.14 J1.13 33.97,39.21 v34.29,38.89
D12  (via drill 0.35)
  Top 0.305: U3.16 37.47,29.84 v37.47,30.96 36.35,32.07 33.66,32.07 32.23,33.5 32.23,34.45 31.11,35.56 31.11,35.82 | 31.11,35.82 Q5.3 v31.11,38.89 | 31.11,35.82 R24.1 | Q9.1 11.43,14.97 v11.43,16.19
  Bottom 0.305: J4.MISO 48.9,33.5 46.35,30.96 v37.47,30.96 | v31.11,38.89 31.43,39.21 J1.11 J1.12 31.43,55.24 30.64,56.04 13.97,56.04 11.91,53.98 6.03,53.98 5.24,53.18 5.24,17.46 6.51,16.19 v11.43,16.19
D13  (via drill 0.35)
  Top 0.305: U3.17 34.29,30.48 | 34.29,30.48 34.05,30.71 | 34.05,30.71 33.8,30.96 | 34.05,30.71 | v36.2,30.16 36.2,31.11 35.88,31.43 34.77,31.43 34.29,30.96 | 34.29,30.96 34.05,30.71 | 34.29,30.96 34.29,30.48 | 34.29,30.96 33.8,30.96 | 33.8,30.96 32.07,32.69 32.07,32.7 31.01,33.76 R31.1 30.06,34.77 28.57,34.77 28.26,35.08 28.26,36.94 Q5.1 v29.21,38.89
  Bottom 0.305: J4.SCK 48.9,30.96 47.31,29.37 36.99,29.37 v36.2,30.16 | J1.10 J1.9 28.89,39.21 v29.21,38.89
D+
  Top 0.305: U2.1 6.06,40.96 5.9,41.12 J3.D+
D-
  Top 0.305: J3.D- 8.08,41.77 8.1,41.75 13.02,41.75 13.49,41.27 13.49,40.16 13.02,39.69 U2.2
GND  (via drill 0.35)
  other vias: 34.29,0.95 39.37,0.95 41.91,0.95 44.45,0.95 37.94,16.19 47.62,14.45 45.24,19.05 48.74,14.45 48.74,15.56 49.85,28.73 67.63,26.19 67.63,16.35 67.63,14.61 65.09,3.17 65.09,1.91 53.18,24.61 60.64,26.51 26.67,13.49 57.31,26.67 1.75,39.85 1.75,42.39 6.35,40.16 7.62,40.16 8.89,42.86 37.15,25.4 42.55,22.54 11.27,52.39 38.1,23.65 18.41,47.15 42.55,24.29 39.21,25.56 30.16,43.02 35.24,43.02 40.32,43.02 46.99,44.61 52.07,44.61 57.15,44.61 62.23,44.61 29.05,30.64 14.92,34.92 1.91,28.1 11.59,23.02 24.61,5.08
  pour Top: 0,0.95 arc90 0.95,0 65.09,0 arc90 66.04,0.95 66.04,5.16 arc-45 66.32,5.84 68.3,7.82 arc45 68.58,8.49 68.58,40.4 arc45 68.3,41.08 66.32,43.06 arc-45 66.04,43.73 66.04,58.26 arc90 65.09,59.21 0.95,59.21 arc90 0,58.26
  pour Bottom: 65.09,59.21 0.95,59.21 arc90 0,58.26 0,0.95 arc90 0.95,0 65.09,0 arc90 66.04,0.95 66.04,5.16 arc-45 66.32,5.84 68.3,7.82 arc45 68.58,8.49 68.58,40.4 arc45 68.3,41.08 66.32,43.06 arc-45 66.04,43.73 66.04,58.26 arc90
I2CPULLUP
  Top 0.305: R2.1 R1.1 13.9,58.16 13.21,57.47 11.59,57.47 10.82,56.7 SS1.3
LA0
  Top 0.305: D19.2 52.07,4.17 52.07,8.73 50.8,10 R43.1
LA0_
  Top 0.305: U4.1 51.55,18.21 50.8,17.46 R43.2
LA1
  Top 0.305: D20.2 54.61,4.17 54.61,8.73 53.34,10 R44.1
LA1_
  Top 0.305: U4.7 55.45,19.25 53.34,17.14 R44.2
LA2
  Top 0.305: D21.2 57.15,4.17 57.15,8.73 55.88,10 R45.1
LA2_
  Top 0.305: R45.2 55.88,17.78 59.49,21.39 U5.7
LA3
  Top 0.305: D22.2 59.69,4.17 59.69,8.73 58.42,10 R46.1
LA3_
  Top 0.305: R46.2 58.42,17.62 60.17,19.37 62.23,19.37 63.82,20.95 63.82,24.92 63.02,25.72 61.28,25.72 60.85,25.29 U5.1
LA4
  Top 0.305: D23.2 62.23,4.17 62.23,8.73 60.96,10 R47.1
LA4_
  Top 0.305: R47.2 60.96,17.46 61.59,18.1 62.87,18.1 66.15,21.39 U5.8
LA5
  Top 0.305: D24.2 64.77,4.17 64.77,8.73 63.5,10 R48.1
LA6
  Top 0.305: 27.88,2.7 D26.2 26.93,2.75 25.61,4.08 Q10.4
LA7
  Top 0.305: Q10.6 25.88,6.03 26.35,5.56 26.35,4.76 27.3,3.81 29.43,3.81 D25.2
LD0
  Top 0.305: R11.2 64.77,46.88 64.77,55.04 D14.2
LD0_
  Top 0.305: Q7.4 63.18,43.44 R11.1
LD1
  Top 0.305: D13.2 62.23,55.04 62.23,46.88 R10.2
LD1_
  Top 0.305: Q7.6 61.28,43.44 R10.1
LD2
  Top 0.305: R9.2 59.69,46.88 59.69,55.04 D12.2
LD2_
  Top 0.305: Q6.4 58.1,43.44 R9.1
LD3
  Top 0.305: D11.2 57.15,55.04 57.15,46.88 R8.2
LD3_
  Top 0.305: Q6.6 56.2,43.44 R8.1
LD4
  Top 0.305: R7.2 54.61,46.88 54.61,55.04 D10.2
LD4_
  Top 0.305: Q4.4 53.02,43.44 R7.1
LD5
  Top 0.305: D9.2 52.07,55.04 52.07,46.88 R6.2
LD5_
  Top 0.305: Q4.6 51.12,43.44 R6.1
LD6
  Top 0.305: R5.2 49.53,46.88 49.53,55.04 D8.2
LD6_
  Top 0.305: R5.1 48.31,43.73 47.94,43.36 Q3.4
LD7
  Top 0.305: D7.2 46.99,55.04 46.99,46.88 R4.2
LD7_
  Top 0.305: Q3.6 46.04,43.44 R4.1
LD8
  Top 0.305: R17.2 42.86,45.29 42.86,55.04 D6.2
LD8_
  Top 0.305: Q2.4 41.27,41.85 R17.1
LD9
  Top 0.305: D5.2 40.32,55.04 40.32,45.29 R16.2
LD9_
  Top 0.305: Q2.6 39.37,41.85 R16.1
LD10
  Top 0.305: R15.2 37.78,45.29 37.78,55.04 D4.2
LD10_
  Top 0.305: Q1.4 36.19,41.85 R15.1
LD11
  Top 0.305: D3.2 35.24,55.04 35.24,45.29 R14.2
LD11_
  Top 0.305: Q1.6 34.29,41.85 R14.1
LD12
  Top 0.305: R13.2 32.7,45.29 32.7,55.04 D2.2
LD12_
  Top 0.305: Q5.4 31.11,41.85 R13.1
LD13
  Top 0.305: R12.2 30.16,45.29 30.16,55.04 D1.2
LD13_
  Top 0.305: Q5.6 29.21,41.85 R12.1
RESET  (via drill 0.35)
  Top 0.305: U3.29 32.63,20.48 32.23,20.48 v32.23,20.5 31.57,20.5 28.26,23.81 v28.26,28.1 28.26,34.13 27.62,34.77 27.62,39.21 26.35,40.48 | R18.2 C5.1 22.12,40.8 26.04,40.8 | 26.35,40.48 26.35,41.12 | 26.35,41.12 26.35,46.51 23.97,48.9 18.15,48.9 16.57,50.48 R3.2 | 26.04,40.8 26.35,40.48 | 26.04,40.8 26.35,41.12
  Bottom 0.305: J4.RESET 62.23,29.69 48.9,29.69 46.83,27.62 35.08,27.62 34.61,28.1 v28.26,28.1 | J5.5 J5.6 33.02,11.75 32.86,11.91 32.86,19.87 v32.23,20.5
RTS#
  Top 0.305: U2.4 12.54,37.15 13.18,37.78 13.18,38.89 14.61,40.32 17.94,40.32 18.26,40.64 C5.2
S$1
  Top 0.305: S1.2 R3.1
S$4
  Top 0.305: LS1.- 20.98,7.43 SS3.1
S$5
  Top 0.305: Q9.3 10.43,14.02 11.43,13.02 15.24,13.02 17.94,10.32 17.94,7.78 19.48,6.24 SS3.2
S$6
  Top 0.305: D17.2 R55.1
S$9
  Top 0.305: R40.1 9.84,7.25 9.84,10.37 Q11.3
S$10
  Top 0.305: D18.2 R56.1
S$12  (via drill 0.35)
  Top 0.305: 11.01,7.78 R40.2 v10.95,9.21 | D27.1 26.61,18.57 24.77,18.57 23.65,17.46 23.65,14.92 22.38,13.65 v19.84,13.65
  Bottom 0.305: v10.95,9.21 10.95,12.7 11.91,13.65 v19.84,13.65
S$13  (via drill 0.35)
  Top 0.305: D26.1 28.04,0.95 v29.21,0.95 | v13.97,2.86 12.96,2.86 R41.2
  Bottom 0.305: v29.21,0.95 28.57,1.59 27.46,1.59 26.19,2.86 v13.97,2.86
S$15  (via drill 0.35)
  Top 0.305: D25.1 30.58,0.95 v31.75,0.95 | R60.2 v10.95,4.45
  Bottom 0.305: v31.75,0.95 30.48,2.22 27.78,2.22 26.51,3.49 20.8,3.49 16.19,8.1 12.06,8.1 10.95,6.99 v10.95,4.45
S$17
  Top 0.305: U5.14 67.58,25.29 67.94,24.92 67.94,20.85 R48.2
S$19
  Top 0.305: R50.2 5.14,11.43 7.33,11.43 S3.1
S$21
  Top 0.305: R53.1 4.82,16.83 2.52,16.83 S2.2
S$22
  Top 0.305: R54.2 5.34,1.91 7.64,1.91 S5.1
S$23
  Top 0.305: R42.1 4.82,7.62 2.52,7.62 S4.2
S$26
  Top 0.305: R30.1 D15.1
S$27
  Top 0.305: Q8.3 9.42,33.66 D16.1
S$29
  Top 0.305: D16.2 R34.2
TRIANG  (via drill 0.35)
  Top 0.305: U4.8 55.45,27.77 55.72,28.04 C11.2 | R37.1 55.88,28.16 C11.2 | C11.2 56.36,27.57 v56.36,26.83 | U4.5 v54.15,21.58 v54.16,21.59 | v52.84,21.59 U4.3 | U5.10 65.42,22.69 65.12,22.38 v65.09,22.38 | v65.09,24.29 65.39,23.99 U5.12 | v61.91,24.29 61.61,23.99 U5.3 | v61.91,22.38 61.61,22.69 U5.5
  Bottom 0.305: 56.04,21.59 56.36,21.59 | 56.36,21.59 56.67,21.59 | v56.36,26.83 56.36,21.59 | 56.04,21.59 56.36,21.91 56.67,21.59 | 56.04,21.59 v54.16,21.59 v52.84,21.59 | v65.09,22.38 v65.09,24.29 v61.91,24.29 v61.91,22.38 61.12,21.59 56.67,21.59
V1+
  Top 0.305: R37.2 54.11,28.23 | 54.11,28.23 52.7,29.63 R36.1 | U4.12 52.85,26.81 53.18,27.15 53.5,27.15 54.11,27.75 54.11,28.23
V1S
  Top 0.305: R36.2 R35.2 51.12,27.94 51.55,27.51 U4.14
V2-
  Top 0.305: R35.1 52.17,30.8 54.83,30.8 C11.1 58.1,27.52 58.1,24.92 57.78,24.61 55.09,24.61 54.8,24.89 U4.9
V3
  Top 0.305: C4.1 18.57,42.39 17.14,40.96 U2.8
VBUS  (via drill 0.35)
  Top 0.305: Q8.2 v12.54,34.6 v12.54,34.61 | v6.35,33.66 F1.2
  Top 0.508: J3.VBUS 3.65,42.42 3.33,42.1 3.33,39.53 4.13,38.73
  Top 0.61: F1.2 5.11,35.05 4.13,36.04 4.13,38.73
  Bottom 0.305: v12.54,34.61 7.3,34.61 v6.35,33.66
VCC  (via drill 0.35)
  Top 0.305: C18.1 40.98,21.52 U3.6 39.05,23.45 39.05,24.29 | 25.4,45.72 25.4,46.51 23.97,47.94 13.97,47.94 | 25.4,45.72 25.4,45.4 | 25.4,45.4 25.4,45.09 | 25.4,45.09 v25.4,43.5 | v45.56,25.4 42.23,25.4 41.43,24.61 39.37,24.61 | 39.05,24.61 39.37,24.61 | 39.05,24.29 39.05,24.61 | 39.05,24.29 39.37,24.61 | C17.1 40.64,19.6 U3.4 37.31,22.93 37.31,24.45 37.94,25.08 | v6.19,48.74 6.19,53.66 7.82,55.29 SS1.2 | U5.4 59.63,23.34 C13.2 59.11,23.65 v58.1,23.65 57.09,23.65 C12.2 55.03,23.76 53.5,22.23 U4.4 | R38.1 v50.01,27.62 | R18.1 C3.1 21.22,45.4 25.08,45.4 | C2.1 U1.8 13.97,46.35 13.65,46.67 13.65,47.62 | 13.34,47.94 v9.53,47.94 | 13.34,47.94 13.65,47.94 | 13.65,47.94 13.97,47.94 | 13.65,47.94 13.65,47.62 | 13.65,47.62 13.97,47.94 | 13.65,47.62 13.34,47.94 | C7.1 31.33,31.59 32.04,31.59 U3.18 35.56,28.07 35.56,27.15 36.51,26.19 37.15,26.19 | 37.47,26.19 37.47,26.51 | 37.47,26.51 37.47,27.3 v36.2,28.57 | 37.15,26.19 37.47,26.19 | 37.15,26.19 37.47,26.51 | 37.47,26.19 37.94,25.72 | 37.94,25.72 38.26,25.4 | 38.26,25.4 38.58,25.08 | 38.58,25.08 39.05,24.61 | 38.26,25.4 | 38.26,25.4 37.94,25.08 | 37.94,25.08 38.58,25.08 | 37.94,25.08 37.94,25.72 | C6.2 8.26,36.99 9.05,36.2 13.34,36.2 14.29,37.15 U2.5 16.41,37.31 v21.27,37.31 v25.4,37.31 | v9.53,23.18 6.95,23.18 5.71,24.42 5.71,26.67 5.04,27.35 SS2.2 | 25.08,45.4 25.4,45.4 | 25.08,45.4 25.4,45.72 | 25.08,45.4 25.4,45.09
  Bottom 0.305: v25.4,43.5 v25.4,37.31 25.4,31.91 28.26,29.05 31.91,29.05 32.38,29.53 35.24,29.53 v36.2,28.57 | v6.19,48.74 6.99,47.94 v9.53,47.94 | J4.VCC 67.47,32.07 67.47,27.46 66.67,26.67 62.87,26.67 61.91,27.62 58.42,27.62 | 58.42,27.62 57.78,27.62 | 57.78,27.62 v50.01,27.62 47.78,25.4 v45.56,25.4 | v58.1,23.65 58.1,27.3 | 58.1,27.3 57.78,27.62 | 58.1,27.3 58.42,27.62 | v9.53,23.18 11.11,24.77 11.11,30.96 12.54,32.38 20.64,32.38 21.27,33.02 v21.27,37.31
VCC/2
  Top 0.305: U4.13 52.2,24.89 51.54,24.23 50.16,24.23 R38.2 R39.2 50.16,22.6 52.92,22.6 54.15,23.83 U4.10
VIN
  Top 0.305: 20.64,21.59 21.11,21.11 | C19.2 21.11,21.11 | 21.11,21.11 20.8,20.8 20.64,20.8
  Top 0.61: U7.3 15.47,24.54 16.83,23.18 19.68,23.18 20.64,22.23 20.64,21.59 20.64,20.8 20.64,20.32 21.27,19.68 24.77,19.68 25.56,20.48 27.28,20.48 F2.2
VIN_RAW  (via drill 0.35)
  Top 0.305: v22.86,10.95 28.73,10.95 31.27,13.49 31.27,15.88 | 31.27,15.88 31.27,16.35 | 31.27,15.88 31.75,16.35 | 31.27,15.88 30.8,16.35 | Q11.2 v13.49,11.9 v13.49,11.91
  Top 0.61: J5.15 J5.16 43.97,9.84 39.69,9.84 33.18,16.35 31.75,16.35 31.27,16.35 30.8,16.35 28.6,16.35 F2.1
  Bottom 0.305: v22.86,10.95 14.45,10.95 v13.49,11.91
XTAL1
  Top 0.305: Y2.1 42.05,21.58 U3.7
XTAL2
  Top 0.305: U3.8 41.42,23.34 42.86,23.34 43.51,23.98 Y2.3

## Text on the board
tPlace: OFF | ON | SCL | SDA | Flanetino Uno+ / Design by: Lucas Flaneto / Rev 1 01/2022 | I²C PULLUP | AREF | GND | 13 | 12 | ~11 | ~10 | ~9 | 8 | 7 | ~6 | ~5 | 4 | ~3 | 2 | 1 | 0 | RESET | 5V | MISO/VCC | SCK/MOSI | RST/GND | ON | 3.3V | A6 | A7 | RESET | 3.3V | 5V | GND | GND | VIN | A0 | A1 | A2 | A3 | A4 | A5